# Altium PCB PCB.PcbDoc
Units mm, origin at the board's own origin, x right, y up, seen from the top; angles counter-clockwise.
Board outline 78 x 122 mm, 2 copper layers (Top Layer, Bottom Layer); 67 components, 96 nets, 356 pads, 13 vias.
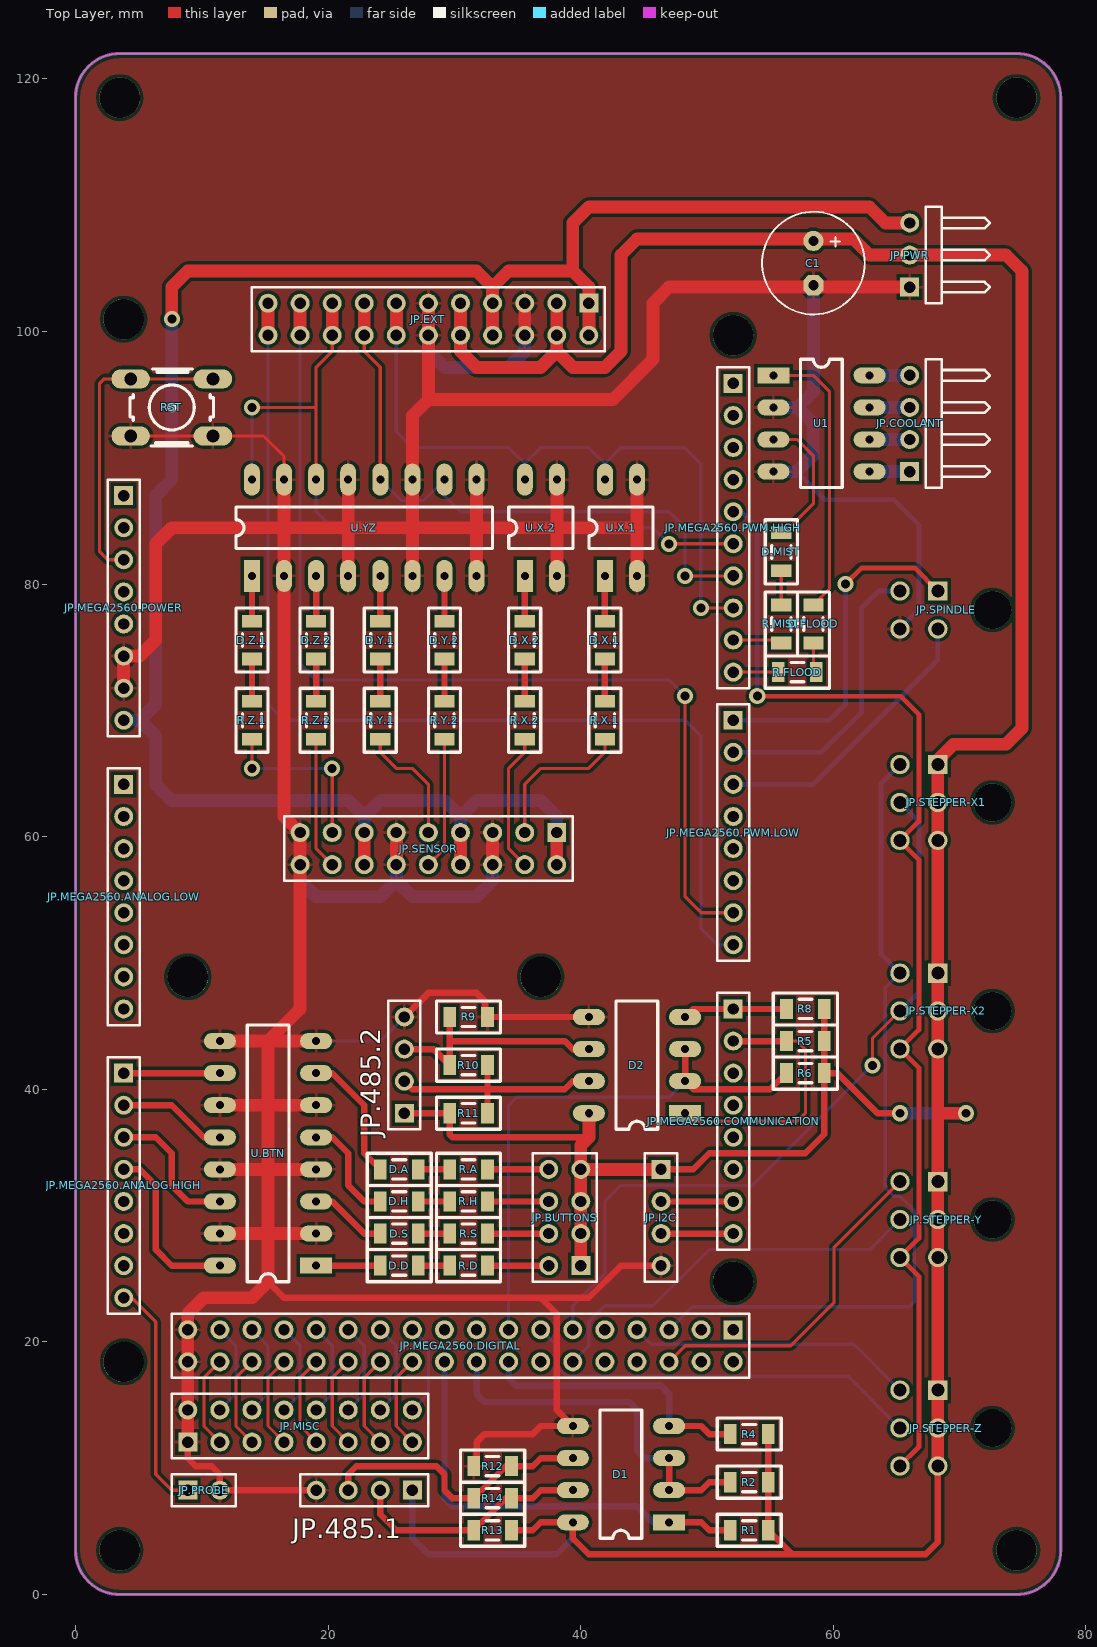
[diagram p0: Top Layer view]
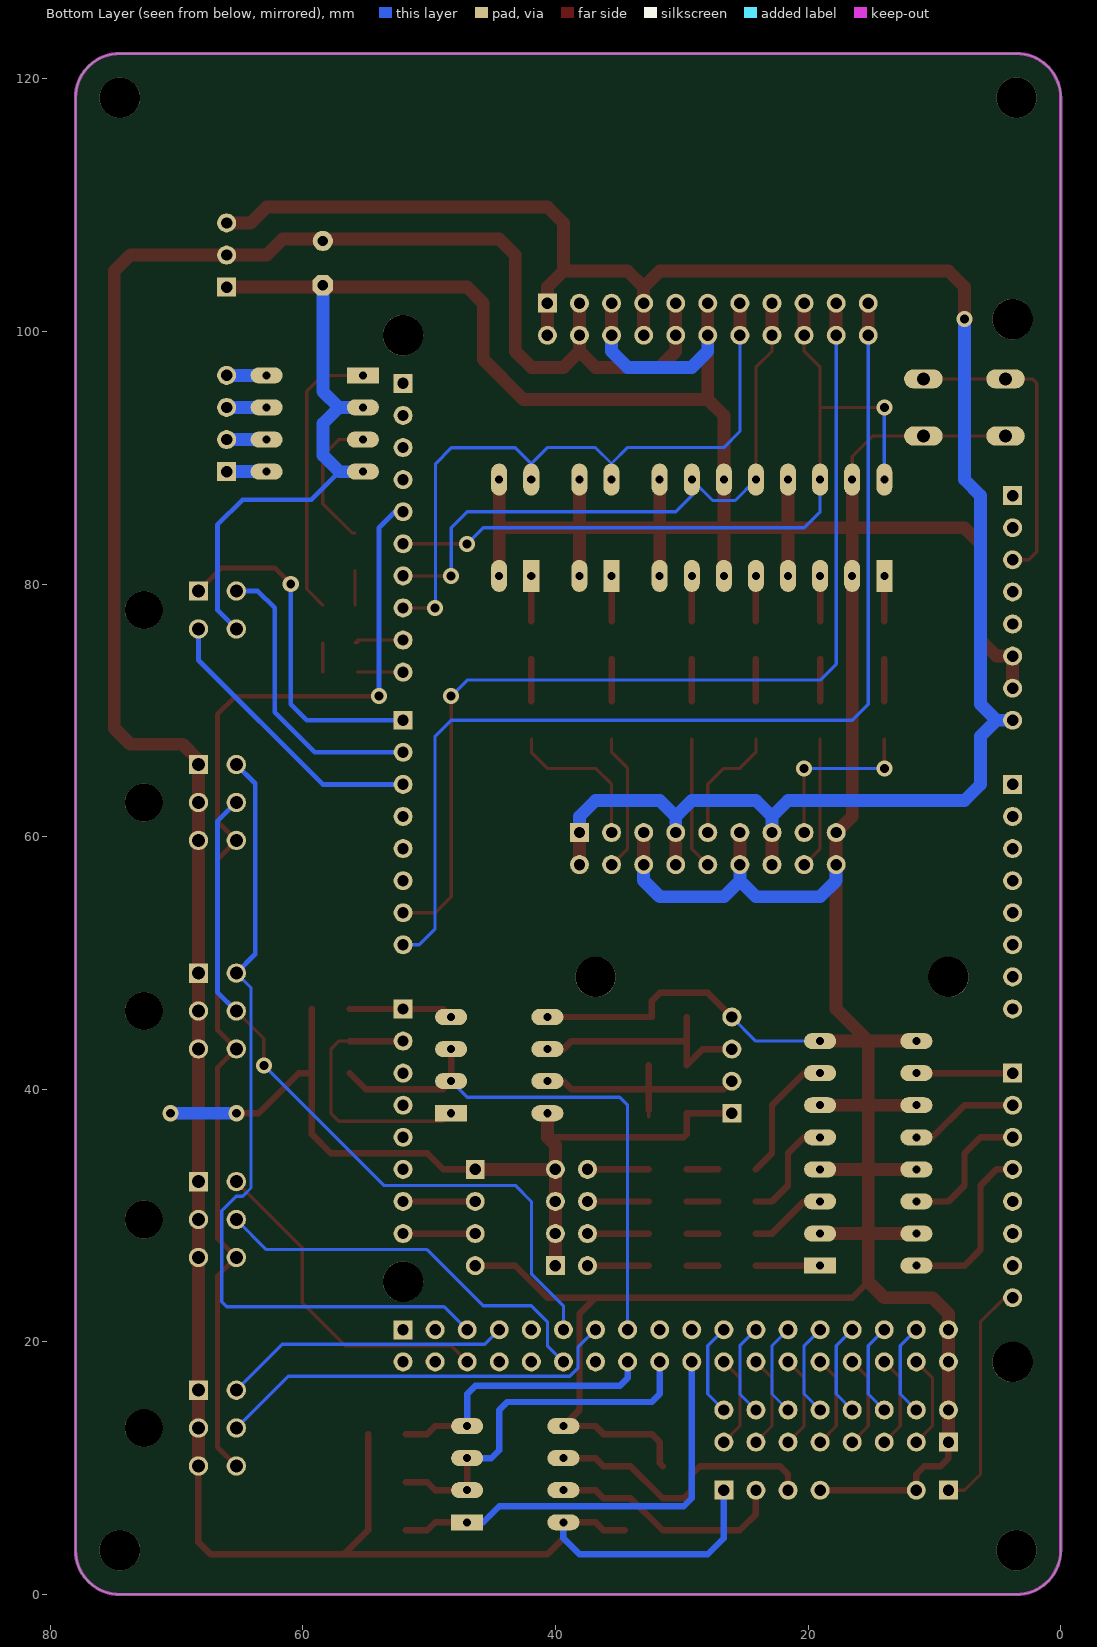
[diagram p1: Bottom Layer view, seen from below]
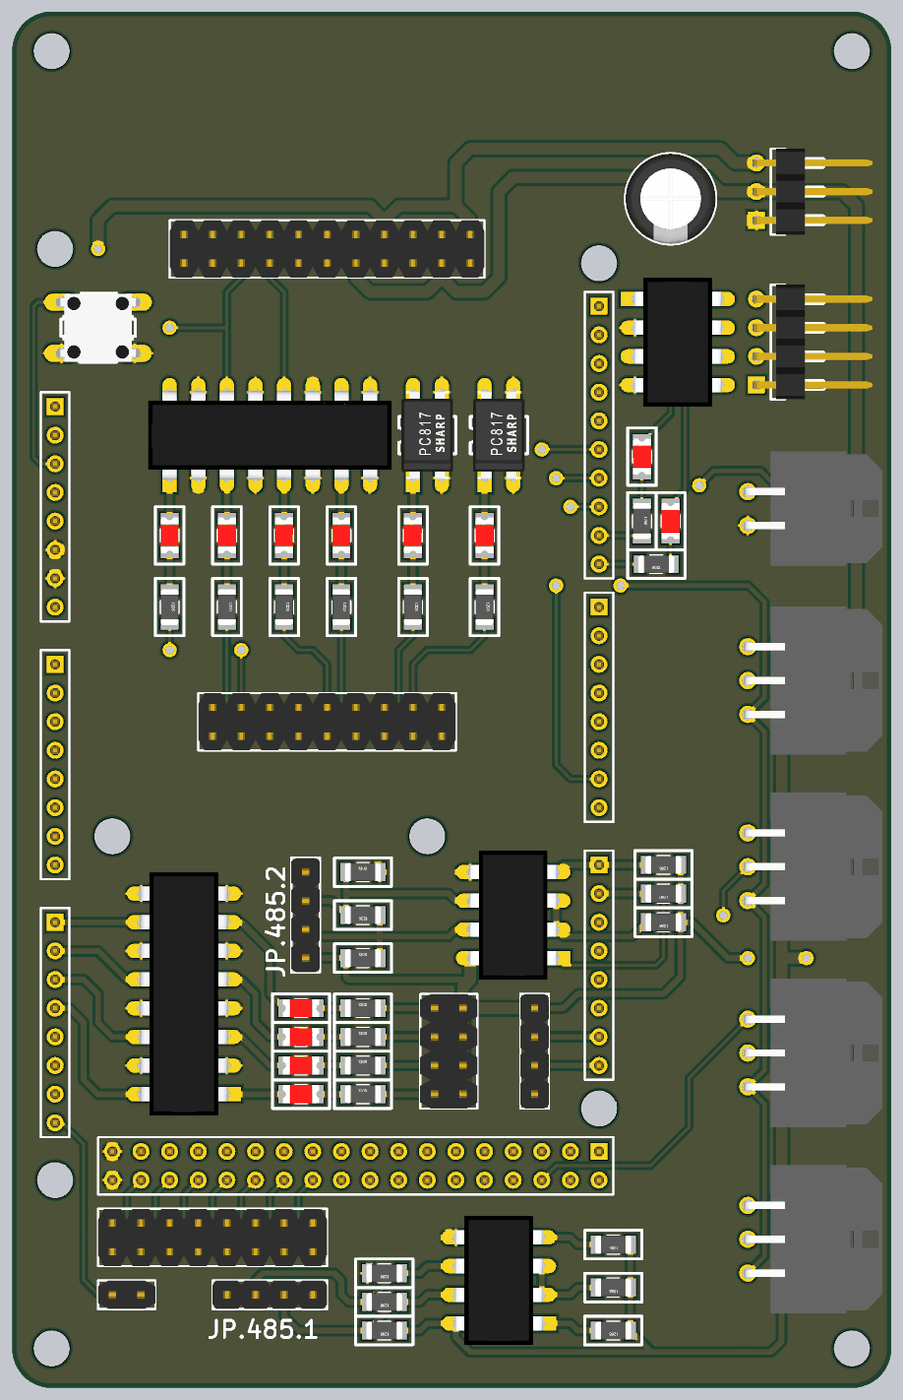
[diagram p2: 3D render of the assembled board from above, using the file's embedded part models]

## Layer stack, top to bottom
Top Solder: solder mask 0.0102, Solder Resist, Dk 3.5
Top Layer: signal copper 0.0356
Dielectric 1: dielectric 0.32, FR-4, Dk 4.8
Bottom Layer: signal copper 0.0356
Bottom Solder: solder mask 0.0102, Solder Resist, Dk 3.5

## Board outline
3.5,0 cw(c3.5,3.5) 0,3.5 0,118.5 cw(c3.5,118.5) 3.5,122 74.5,122 cw(c74.5,118.5) 78,118.5 78,3.5 cw(c74.5,3.5) 74.5,0

## Design rules (kind name [scope] priority, off if disabled: settings)
Clearance [All] p1: gap=0.254
HoleSize [All] p1: absolutevalues=TRUE maxlimit=6.3 minlimit=0.2 maxpercent=80.000 minpercent=20.000
PolygonConnect [All] p1: connectstyle=Relief reliefconductorwidth=0.254 reliefentries=4 polygonreliefangle="90 Angle" airgapwidth=0.254
RoutingVias [All] p1: holewidth=0.711 width=1.27 viastyle="Through Hole" minholewidth=0.711 minwidth=1.27 maxholewidth=0.711 maxwidth=1.27
SMDNeckDown [All] p1: percent=75.000
SilkToSilkClearance [All] p1: silktosilkclearance=0.152
SolderMaskExpansion [All] p1: expansion=0.102
Width [All] p1: maxlimit=2.54 minlimit=0.254 preferedwidth=0.254
28 further rules are at their usual default settings.

## Components (designator, comment, footprint, x,y, rotation, side; value= is the part's Value field where it differs from the comment)
C1 "*" E3,5-8 58.42,105.41 r270 top
D1 "MAX485" DIP8 43.18,9.525 r180 top
D2 "MAX485" DIP8 44.45,41.91 r180 top
D.A "LED" 1206-SMD-LED 25.63,33.655 r180 top
D.D "LED" 1206-SMD-LED 25.63,26.035 r180 top
D.FLOOD "LED" 1206-SMD-LED 58.42,76.835 r90 top
D.H "LED" 1206-SMD-LED 25.63,31.115 r180 top
D.MIST "LED" 1206-SMD-LED 55.88,82.55 r90 top
D.S "LED" 1206-SMD-LED 25.63,28.575 r180 top
D.X.1 "LED" 1206-SMD-LED 41.91,75.565 r90 top
D.X.2 "LED" 1206-SMD-LED 35.56,75.565 r90 top
D.Y.1 "LED" 1206-SMD-LED 24.13,75.565 r90 top
D.Y.2 "LED" 1206-SMD-LED 29.21,75.565 r90 top
D.Z.1 "LED" 1206-SMD-LED 13.97,75.565 r90 top
D.Z.2 "LED" 1206-SMD-LED 19.05,75.565 r90 top
JP.485.1 "HDR4" HDR1X4 22.86,8.255 r180 top
JP.485.2 "HDR4" HDR1X4 26.035,41.91 r90 top
JP.BUTTONS "HDR2X4" HDR2X4 38.735,29.845 r90 top
JP.COOLANT "HDR4" HDR1X4H 66.04,92.71 r90 top
JP.EXT "HDR2X11" HDR2X11 27.94,100.965 r180 top
JP.I2C "HDR4" HDR1X4 46.355,29.845 r270 top
JP.MEGA2560.ANALOG.HIGH "HDR8" HDR8-BOTTOM 3.81,32.385 r270 top
JP.MEGA2560.ANALOG.LOW "HDR8" HDR8-BOTTOM 3.81,55.245 r270 top
JP.MEGA2560.COMMUNICATION "HDR8" HDR8-BOTTOM 52.07,37.465 r270 top
JP.MEGA2560.DIGITAL "HDR2X18" HDR2X18-BOTTOM 30.48,19.685 r180 top
JP.MEGA2560.POWER "HDR8" HDR8-BOTTOM 3.81,78.105 r270 top
JP.MEGA2560.PWM.HIGH "HDR10" HDR10-BOTTOM 52.07,84.455 r270 top
JP.MEGA2560.PWM.LOW "HDR8" HDR8-BOTTOM 52.07,60.325 r270 top
JP.MISC "HDR2X8" HDR2X8 17.78,13.335 r0 top
JP.PROBE "HDR2" HDR1X2 10.16,8.255 r0 top
JP.PWR "HDR3" HDR1X3H 66.04,106.045 r90 top
JP.SENSOR "HDR2X9" HDR2X9 27.94,59.055 r180 top
JP.SPINDLE "43045-0400" 43045-0400 72.59,77.945 r90 top
JP.STEPPER-X1 "43045-0600" 43045-0600 72.59,62.705 r90 top
JP.STEPPER-X2 "43045-0600" 43045-0600 72.59,46.195 r90 top
JP.STEPPER-Y "43045-0600" 43045-0600 72.59,29.685 r90 top
JP.STEPPER-Z "43045-0600" 43045-0600 72.59,13.175 r90 top
R1 "*" 1206-SMD-RES 53.34,5.08 r0 top
R2 "*" 1206-SMD-RES 53.34,8.89 r0 top
R4 "*" 1206-SMD-RES 53.34,12.7 r0 top
R5 "*" 1206-SMD-RES 57.785,43.815 r0 top
R6 "*" 1206-SMD-RES 57.785,41.275 r0 top
R8 "*" 1206-SMD-RES 57.785,46.355 r0 top
R9 "*" 1206-SMD-RES 31.115,45.72 r180 top
R10 "*" 1206-SMD-RES 31.115,41.91 r0 top
R11 "*" 1206-SMD-RES 31.115,38.1 r180 top
R12 "*" 1206-SMD-RES 33.02,10.16 r0 top
R13 "*" 1206-SMD-RES 33.02,5.08 r0 top
R14 "*" 1206-SMD-RES 33.02,7.62 r0 top
R.A "*" 1206-SMD-RES 31.115,33.655 r180 top
R.D "*" 1206-SMD-RES 31.115,26.035 r180 top
R.FLOOD "*" 1206-SMD-RES 57.15,73.025 r0 top
R.H "*" 1206-SMD-RES 31.115,31.115 r180 top
R.MIST "*" 1206-SMD-RES 55.88,76.835 r90 top
R.S "*" 1206-SMD-RES 31.115,28.575 r180 top
R.X.1 "*" 1206-SMD-RES 41.91,69.215 r90 top
R.X.2 "*" 1206-SMD-RES 35.56,69.215 r90 top
R.Y.1 "*" 1206-SMD-RES 24.13,69.215 r90 top
R.Y.2 "*" 1206-SMD-RES 29.21,69.215 r90 top
R.Z.1 "*" 1206-SMD-RES 13.97,69.215 r90 top
R.Z.2 "*" 1206-SMD-RES 19.05,69.215 r90 top
RST "OMRON SWITCH" B3F-10XX 7.62,93.98 r180 top
U1 "LTV827" DIP8 59.055,92.71 r0 top
U.BTN "LTV847" DIP16 15.24,34.925 r180 top
U.X.1 "PC817" DIP4 43.18,84.455 r90 top
U.X.2 "PC817" DIP4 36.83,84.455 r90 top
U.YZ "LTV847" DIP16 22.86,84.455 r90 top

## Footprints (in the part's own frame and the unit in brackets; to place one, negate y for a bottom-side part, rotate by r counter-clockwise, add the part's x,y. Pads: shape width x height; smd on the part's side, far side on the other; paste and mask are expansions set on the pad)
1206-SMD-LED [mm]
  rect 1x1.6 smd: 1(-1.5,0) 2(1.5,0)
  silkscreen extent -2.54,-1.27 2.54,1.27, body extent -1.6,-0.8 1.6,0.8, height 1.11
1206-SMD-RES [mm]
  rect 1x1.6 smd: 1(-1.5,0) 2(1.5,0)
  silkscreen extent -2.54,-1.27 2.54,1.27, body extent -1.6,-0.8 1.6,0.8, height 1.01
43045-0400 [mm]
  round 3 hole 3 unplated: 0(0,0)
  rect 1.53x1.53 hole 1.02: 1(1.5,4.32)
  round 1.53 hole 1.02: 2(-1.5,4.32) 3(1.5,7.32) 4(-1.5,7.32)
  body extent -5.07,-4.6 5.07,7.64, height 8.78
43045-0600 [mm]
  round 3 hole 3 unplated: 0(0,0)
  rect 1.53x1.53 hole 1.02: 1(3,4.32)
  round 1.53 hole 1.02: 2(0,4.32) 3(-3,4.32) 4(3,7.32) 5(0,7.32) 6(-3,7.32)
  body extent -6.57,-4.6 6.57,7.64, height 8.78
B3F-10XX [mil]
  oval 120x60 hole 40: 1(-128,89) 2(128,89) 3(-128,-89) 4(128,-89)
  silkscreen extent -130,-120 130,120, body extent -152,-118 152,118, height 170
DIP4 [mm]
  rect 2.54x1.27 hole 0.635: 1(-3.81,1.261)
  oval 2.54x1.27 hole 0.635: 2(-3.81,-1.279) 3(3.81,-1.279) 4(3.81,1.261)
  silkscreen extent -1.65,-2.55 1.65,2.53, body extent -3.94,-2.3 3.94,2.3, height 4.3
DIP8 [mm]
  rect 2.54x1.27 hole 0.635: 1(-3.81,3.81)
  oval 2.54x1.27 hole 0.635: 2(-3.81,1.27) 3(-3.81,-1.27) 4(-3.81,-3.81) 5(3.81,-3.81) 6(3.81,-1.27) 7(3.81,1.27) 8(3.81,3.81)
  silkscreen extent -1.65,-5.08 1.65,5.08, body extent -3.94,-5.71 3.94,5.72, height 4.19
DIP16 [mm]
  rect 2.54x1.27 hole 0.635: 1(-3.81,8.89)
  oval 2.54x1.27 hole 0.635: 2(-3.81,6.35) 3(-3.81,3.81) 4(-3.81,1.27) 5(-3.81,-1.27) 6(-3.81,-3.81) 7(-3.81,-6.35) 8(-3.81,-8.89) 9(3.81,-8.89) 10(3.81,-6.35) 11(3.81,-3.81) 12(3.81,-1.27) 13(3.81,1.27) 14(3.81,3.81) 15(3.81,6.35) 16(3.81,8.89)
  silkscreen extent -1.65,-10.16 1.65,10.16, body extent -3.94,-10.79 3.94,10.79, height 4.19
E3,5-8 [mil]
  round 63 hole 32: +(-68.9,0)
  oct 63x63 hole 32: -(68.9,0)
  silkscreen extent -160,-160 160,160, body extent -158,-157 158,157, height 484
HDR1X2 [mm] "Connector; Header; 2 Position"
  rect 1.5x1.5 hole 0.9: 1(-1.27,0)
  round 1.5 hole 0.9: 2(1.27,0)
  silkscreen extent -2.54,-1.27 2.54,1.27, body extent -2.54,-1.27 2.54,1.27, height 8.61
HDR1X3H [mm] "Connector; Header; 3 Position; Right Angle"
  rect 1.5x1.5 hole 0.9: 1(-2.54,0)
  round 1.5 hole 0.9: 2(0,0) 3(2.54,0)
  silkscreen extent -3.81,-6.35 3.81,-1.27, body extent -3.81,-10.3 3.81,0.32, height 2.55
HDR1X4 [mm] "Connector; Header; 4 Position"
  rect 1.5x1.5 hole 0.9: 1(-3.81,0)
  round 1.5 hole 0.9: 2(-1.27,0) 3(1.27,0) 4(3.81,0)
  silkscreen extent -5.08,-1.27 5.08,1.27, body extent -5.08,-1.27 5.08,1.27, height 9.11
HDR1X4H [mm] "Connector; Header; 4 Position; Right Angle"
  rect 1.5x1.5 hole 0.9: 1(-3.81,0)
  round 1.5 hole 0.9: 2(-1.27,0) 3(1.27,0) 4(3.81,0)
  silkscreen extent -5.08,-6.35 5.08,-1.27, body extent -5.08,-10.3 5.08,0.32, height 2.55
HDR2X4 [mm] "Connector; Header; 4x2 Position"
  rect 1.5x1.5 hole 0.9: 1(-3.81,-1.27)
  round 1.5 hole 0.9: 2(-3.81,1.27) 3(-1.27,-1.27) 4(-1.27,1.27) 5(1.27,-1.27) 6(1.27,1.27) 7(3.81,-1.27) 8(3.81,1.27)
  silkscreen extent -5.08,-2.54 5.08,2.54, body extent -5.08,-2.54 5.08,2.54, height 8.61
HDR2X8 [mm] "Connector; Header; 8x2 Position"
  rect 1.5x1.5 hole 0.9: 1(-8.89,-1.27)
  round 1.5 hole 0.9: 2(-8.89,1.27) 3(-6.35,-1.27) 4(-6.35,1.27) 5(-3.81,-1.27) 6(-3.81,1.27) 7(-1.27,-1.27) 8(-1.27,1.27) 9(1.27,-1.27) 10(1.27,1.27) 11(3.81,-1.27) 12(3.81,1.27) 13(6.35,-1.27) 14(6.35,1.27) 15(8.89,-1.27) 16(8.89,1.27)
  silkscreen extent -10.16,-2.54 10.16,2.54, body extent -10.16,-2.54 10.16,2.54, height 8.61
HDR2X9 [mm] "Connector; Header; 9x2 Position"
  rect 1.5x1.5 hole 0.9: 1(-10.16,-1.27)
  round 1.5 hole 0.9: 2(-10.16,1.27) 3(-7.62,-1.27) 4(-7.62,1.27) 5(-5.08,-1.27) 6(-5.08,1.27) 7(-2.54,-1.27) 8(-2.54,1.27) 9(0,-1.27) 10(0,1.27) 11(2.54,-1.27) 12(2.54,1.27) 13(5.08,-1.27) 14(5.08,1.27) 15(7.62,-1.27) 16(7.62,1.27) 17(10.16,-1.27) 18(10.16,1.27)
  silkscreen extent -11.43,-2.54 11.43,2.54, body extent -11.43,-2.54 11.43,2.54, height 8.61
HDR2X11 [mm] "Connector; Header; 11x2 Position"
  rect 1.5x1.5 hole 0.9: 1(-12.7,-1.27)
  round 1.5 hole 0.9: 2(-12.7,1.27) 3(-10.16,-1.27) 4(-10.16,1.27) 5(-7.62,-1.27) 6(-7.62,1.27) 7(-5.08,-1.27) 8(-5.08,1.27) 9(-2.54,-1.27) 10(-2.54,1.27) 11(0,-1.27) 12(0,1.27) 13(2.54,-1.27) 14(2.54,1.27) 15(5.08,-1.27) 16(5.08,1.27) 17(7.62,-1.27) 18(7.62,1.27) 19(10.16,-1.27) 20(10.16,1.27) 21(12.7,-1.27) 22(12.7,1.27)
  silkscreen extent -13.97,-2.54 13.97,2.54, body extent -13.97,-2.54 13.97,2.54, height 8.61
HDR2X18-BOTTOM [mm]
  rect 1.5x1.5 hole 0.9: 1(-21.59,-1.27)
  round 1.5 hole 0.9: 2(-21.59,1.27) 3(-19.05,-1.27) 4(-19.05,1.27) 5(-16.51,-1.27) 6(-16.51,1.27) 7(-13.97,-1.27) 8(-13.97,1.27) 9(-11.43,-1.27) 10(-11.43,1.27) 11(-8.89,-1.27) 12(-8.89,1.27) 13(-6.35,-1.27) 14(-6.35,1.27) 15(-3.81,-1.27) 16(-3.81,1.27) 17(-1.27,-1.27) 18(-1.27,1.27) 19(1.27,-1.27) 20(1.27,1.27) 21(3.81,-1.27) 22(3.81,1.27) 23(6.35,-1.27) 24(6.35,1.27) 25(8.89,-1.27) 26(8.89,1.27) 27(11.43,-1.27) 28(11.43,1.27) 29(13.97,-1.27) 30(13.97,1.27) 31(16.51,-1.27) 32(16.51,1.27) 33(19.05,-1.27) 34(19.05,1.27) 35(21.59,-1.27) 36(21.59,1.27)
  silkscreen extent -22.86,-2.54 22.86,2.54, body extent -22.86,-2.54 22.86,2.54, height 8.61
HDR8-BOTTOM [mm]
  rect 1.5x1.5 hole 0.9: 1(-8.89,0)
  round 1.5 hole 0.9: 2(-6.35,0) 3(-3.81,0) 4(-1.27,0) 5(1.27,0) 6(3.81,0) 7(6.35,0) 8(8.89,0)
  silkscreen extent -10.16,-1.27 10.16,1.27, body extent -10.16,-1.27 10.16,1.27, height 9.11
HDR10-BOTTOM [mm]
  rect 1.5x1.5 hole 0.9: 1(-11.43,0)
  round 1.5 hole 0.9: 2(-8.89,0) 3(-6.35,0) 4(-3.81,0) 5(-1.27,0) 6(1.27,0) 7(3.81,0) 8(6.35,0) 9(8.89,0) 10(11.43,0)
  silkscreen extent -12.7,-1.27 12.7,1.27, body extent -12.7,-1.27 12.7,1.27, height 9.11

## Part data
C1: library part CAP.POL, "Polarized Capacitor (Radial)"
R1 R2 R4 R5 R6 R8 R9 R10 R11 R12 R13 R14 R.A R.D R.FLOOD R.H R.MIST R.S R.X.1 R.X.2 R.Y.1 R.Y.2 R.Z.1 R.Z.2: library part RES
RST: library part B3F-10-XX

## Free pads (board coordinates)
  round 3.2 hole 3.2 unplated: 0(3.5,3.5) 0(3.5,118.5) 0(3.81,18.415) 0(3.81,100.965) 0(8.89,48.895) 0(36.83,48.895) 0(52.07,24.765) 0(52.07,99.695) 0(74.5,3.5) 0(74.5,118.5)

## Via types
v1: diameter 1.27, hole 0.711, Top Layer to Bottom Layer, 13 vias

## Nets (pads, with @x,y where several pads share a name; then routed paths per layer and width w, separated by ;. In a path a pad name is that pad's centre, name@x,y a point inside that pad or via, vN(x,y) a via of type N, cw(c..) or ccw(c..) an arc to the next point about the centre after c; other vN are vias at no path point)
+5V: C1.+ D1.8 D2.8 JP.485.1.1 JP.485.2.1 JP.BUTTONS.1 JP.BUTTONS.3 JP.BUTTONS.5 JP.BUTTONS.7 JP.EXT.3 JP.EXT.4 JP.EXT.9 JP.EXT.10 JP.I2C.1 JP.PWR.2 JP.STEPPER-X1.1 JP.STEPPER-X1.2 JP.STEPPER-X1.3 JP.STEPPER-X2.1 JP.STEPPER-X2.2 JP.STEPPER-X2.3 JP.STEPPER-Y.1 JP.STEPPER-Y.2 JP.STEPPER-Y.3 JP.STEPPER-Z.1 JP.STEPPER-Z.2 JP.STEPPER-Z.3 R1.2 R2.2 R4.2 R5.2 R6.2 R8.2 R11.2 R13.2 | length 308.5
  Top Layer w0.508: JP.485.2.1 R11.2 29.615,36.425 29.845,36.195 40.64,36.195 ; R13.2 36.195,5.08 36.83,5.715 D1.8 39.37,4.445 40.64,3.175 56.745,3.175 ; JP.I2C.1 48.895,33.655 50.165,34.925 57.785,34.925 59.285,36.425 R6.2 ; R4.2 R2.2 R1.2 56.745,3.175 ; R8.2 R5.2 R6.2 ; v1(65.27,38.1) 63.5,38.1 60.325,41.275 R6.2 ; JP.STEPPER-Z.3 68.27,4.135 67.31,3.175 56.745,3.175
  Top Layer w1.016: JP.EXT.9 JP.EXT.10 30.48,98.425 31.75,97.155 36.83,97.155 38.1,98.425 ; JP.EXT.3 JP.EXT.4 38.1,98.425 ; JP.BUTTONS.1 JP.BUTTONS.3 JP.BUTTONS.5 JP.BUTTONS.7 ; D2.8 40.64,36.195 40.005,35.56 JP.BUTTONS.7 ; JP.I2C.1 JP.BUTTONS.7 ; JP.STEPPER-Z.3 JP.STEPPER-Z.2 JP.STEPPER-Z.1 JP.STEPPER-Y.3 JP.STEPPER-Y.2 JP.STEPPER-Y.1 JP.STEPPER-X2.3 JP.STEPPER-X2.2 JP.STEPPER-X2.1 JP.STEPPER-X1.3 JP.STEPPER-X1.2 JP.STEPPER-X1.1 68.27,66.065 69.515,67.31 73.66,67.31 74.93,68.58 74.93,104.775 73.66,106.045 JP.PWR.2 62.865,106.045 61.595,107.315 58.575,107.315 C1.+ 58.265,107.315 44.45,107.315 43.18,106.045 43.18,98.425 41.91,97.155 39.37,97.155 38.1,98.425 ; 68.27,38.1 v1(70.485,38.1)
  Bottom Layer w0.508: JP.485.1.1 26.67,4.445 27.94,3.175 38.1,3.175 39.37,4.445 D1.8
  Bottom Layer w1.016: v1(65.27,38.1) v1(70.485,38.1)
A1: D1.6 JP.485.1.3 R12.2 R14.1 | length 22.4
  Top Layer w0.508: JP.485.1.3 21.59,9.525 22.225,10.16 28.575,10.16 29.21,9.525 29.21,8.255 29.845,7.62 R14.1 34.06,10.16 R12.2 36.195,10.16 36.83,10.795 D1.6
A2: D2.6 JP.485.2.3 R9.2 R10.1 | length 19.2
  Top Layer w0.508: JP.485.2.3 28.345,43.18 R10.1 29.615,43.815 ; R9.2 29.615,43.815 ; D2.6 39.37,43.18 38.735,43.815 29.615,43.815
B1: D1.7 JP.485.1.2 R13.1 R14.2 | length 19
  Top Layer w0.508: JP.485.1.2 24.13,6.35 25.4,5.08 R13.1 34.06,7.62 R14.2 36.195,7.62 36.83,8.255 D1.7
B2: D2.7 JP.485.2.2 R10.2 R11.1 | length 19.2
  Top Layer w0.254: R11.1@32.615,37.8 R11.1 R11.1@32.615,38.33
  Top Layer w0.508: JP.485.2.2 26.67,40.005 32.615,40.005 ; R11.1@32.615,38.33 32.615,40.005 ; R10.2 32.615,40.005 ; D2.7 39.37,40.64 38.735,40.005 32.615,40.005
MEGA2560.A8.RESET.ABORT: JP.MEGA2560.ANALOG.HIGH.1 U.BTN.10 | length 7.6
  Top Layer w0.508: JP.MEGA2560.ANALOG.HIGH.1 U.BTN.10
MEGA2560.A9.FEED.HOLD: JP.MEGA2560.ANALOG.HIGH.2 U.BTN.12 | length 8.7
  Top Layer w0.508: JP.MEGA2560.ANALOG.HIGH.2 7.62,38.735 10.16,36.195 U.BTN.12
MEGA2560.A10.CYCLE.START: JP.MEGA2560.ANALOG.HIGH.3 U.BTN.14 | length 11.2
  Top Layer w0.508: JP.MEGA2560.ANALOG.HIGH.3 6.35,36.195 7.62,34.925 7.62,32.385 8.89,31.115 U.BTN.14
MEGA2560.A11.SAFETY.DOOR: JP.MEGA2560.ANALOG.HIGH.4 U.BTN.16 | length 13.8
  Top Layer w0.508: JP.MEGA2560.ANALOG.HIGH.4 5.08,33.655 6.35,32.385 6.35,27.305 7.62,26.035 U.BTN.16
MEGA2560.A15.PROBE: JP.MEGA2560.ANALOG.HIGH.8 JP.PROBE.1 | length 18.5
  Top Layer w0.254: JP.MEGA2560.ANALOG.HIGH.8 4.445,23.495 6.35,21.59 6.35,9.525 7.62,8.255 JP.PROBE.1
MEGA2560.D0.RXD0: JP.EXT.21 JP.EXT.22 JP.MEGA2560.PWM.LOW.8 | length 85.4
  Top Layer w1.016: JP.EXT.22 JP.EXT.21
  Bottom Layer w0.254: JP.EXT.22 15.24,70.485 16.51,69.215 48.26,69.215 49.53,67.945 49.53,52.705 50.8,51.435 JP.MEGA2560.PWM.LOW.8
MEGA2560.D1.TXD0: JP.EXT.19 JP.EXT.20 JP.MEGA2560.PWM.LOW.7 | length 80.3
  Top Layer w0.254: v1(48.26,71.12) 48.26,55.245 49.53,53.975 JP.MEGA2560.PWM.LOW.7
  Top Layer w1.016: JP.EXT.20 JP.EXT.19
  Bottom Layer w0.254: JP.EXT.20 17.78,73.66 19.05,72.39 46.99,72.39 v1(48.26,71.12)
MEGA2560.D5.SPINDLE.DIR: JP.MEGA2560.PWM.LOW.3 JP.SPINDLE.2 | length 22.7
  Bottom Layer w0.381: JP.MEGA2560.PWM.LOW.3 58.42,64.135 68.27,73.985 JP.SPINDLE.2
MEGA2560.D6.SPINDLE.EN: JP.MEGA2560.PWM.LOW.2 JP.SPINDLE.3 | length 23.3
  Bottom Layer w0.381: JP.MEGA2560.PWM.LOW.2 59.055,66.675 62.23,69.85 62.23,78.105 63.57,79.445 JP.SPINDLE.3
MEGA2560.D7.SPINDLE.PWM: JP.MEGA2560.PWM.LOW.1 JP.SPINDLE.1 | length 27.5
  Top Layer w0.381: v1(60.96,80.01) 62.23,81.28 66.435,81.28 JP.SPINDLE.1
  Bottom Layer w0.381: JP.MEGA2560.PWM.LOW.1 59.69,69.215 60.96,70.485 v1(60.96,80.01)
MEGA2560.D8.COOLANT.FLOOD: JP.MEGA2560.PWM.HIGH.10 R.FLOOD.1 | length 3.6
  Top Layer w0.254: JP.MEGA2560.PWM.HIGH.10 R.FLOOD.1
MEGA2560.D9.COOLANT.MIST: JP.MEGA2560.PWM.HIGH.9 R.MIST.1 | length 4
  Top Layer w0.254: JP.MEGA2560.PWM.HIGH.9 55.65,75.565 55.65,75.387 55.828,75.387 R.MIST.1
MEGA2560.D10.LIMIT.X: JP.EXT.13 JP.EXT.14 JP.MEGA2560.PWM.HIGH.8 U.X.1.4 U.X.2.4 | length 53.9
  Top Layer w0.254: v1(49.53,78.105) JP.MEGA2560.PWM.HIGH.8
  Top Layer w1.016: JP.EXT.14 JP.EXT.13
  Bottom Layer w0.254: JP.EXT.14 25.4,92.075 26.67,90.805 34.308,90.805 35.569,89.544 ; U.X.2.4 35.569,89.544 ; U.X.1.4 U.X.1.4@41.919,89.526 ; v1@49.494,78.141 49.494,89.535 48.242,90.787 43.18,90.787 U.X.1.4@41.919,89.526 ; 35.569,89.544 36.83,90.805 40.64,90.805 U.X.1.4@41.919,89.526
MEGA2560.D11.LIMIT.Y: JP.EXT.15 JP.EXT.16 JP.MEGA2560.PWM.HIGH.7 U.YZ.10 U.YZ.12 | length 49.9
  Top Layer w0.254: JP.EXT.16 22.86,98.425 24.13,97.155 U.YZ.12 ; v1(48.26,80.645) JP.MEGA2560.PWM.HIGH.7
  Top Layer w1.016: JP.EXT.16 JP.EXT.15
  Bottom Layer w0.254: U.YZ.12 25.781,86.614 27.559,86.614 U.YZ.10 29.21,86.995 30.48,85.725 46.99,85.725 48.26,84.455 v1(48.26,80.645)
MEGA2560.D12.LIMIT.Z: JP.EXT.17 JP.EXT.18 JP.MEGA2560.PWM.HIGH.6 U.YZ.14 U.YZ.16 | length 61.9
  Top Layer w0.254: v1(13.97,93.98) 19.05,93.98 ; U.YZ.14 19.05,97.155 20.32,98.425 JP.EXT.18 ; v1(46.99,83.185) JP.MEGA2560.PWM.HIGH.6
  Top Layer w1.016: JP.EXT.18 JP.EXT.17
  Bottom Layer w0.254: U.YZ.16 v1(13.97,93.98) ; U.YZ.14 19.05,85.725 20.32,84.455 45.72,84.455 v1(46.99,83.185)
MEGA2560.D13.STEPPER.EN: JP.MEGA2560.PWM.HIGH.5 JP.STEPPER-X1.6 JP.STEPPER-X2.6 JP.STEPPER-Y.6 JP.STEPPER-Z.6 | length 93.6
  Top Layer w0.254: JP.MEGA2560.PWM.HIGH.5 JP.MEGA2560.PWM.HIGH.5@52.705,85.725
  Top Layer w0.381: v1(53.975,71.12) 65.325,71.12 66.77,69.675 66.77,61.205 JP.STEPPER-X1.6 65.27,59.675 66.77,58.175 66.77,44.695 JP.STEPPER-X2.6 66.77,41.695 66.77,28.185 JP.STEPPER-Y.6 66.77,25.185 66.77,11.675 JP.STEPPER-Z.6
  Bottom Layer w0.381: JP.MEGA2560.PWM.HIGH.5 52.705,85.725 53.975,84.455 v1(53.975,71.12)
MEGA2560.D14.TXD3: D2.4 JP.MEGA2560.COMMUNICATION.1 R8.1 | length 8.3
  Top Layer w0.508: D2.4 48.895,46.355 JP.MEGA2560.COMMUNICATION.1 R8.1
MEGA2560.D15.RXD3: D2.1 JP.MEGA2560.COMMUNICATION.2 R5.1 | length 21.1
  Top Layer w0.254: D2.1 48.895,37.465 57.15,37.465 57.785,38.1 57.785,43.18 57.15,43.815 R5.1
  Top Layer w0.508: JP.MEGA2560.COMMUNICATION.2 R5.1
MEGA2560.D16.TXD2: JP.MEGA2560.COMMUNICATION.3
MEGA2560.D17.RXD2: JP.MEGA2560.COMMUNICATION.4
MEGA2560.D18.TXD1: JP.MEGA2560.COMMUNICATION.5
MEGA2560.D19.RXD1: JP.MEGA2560.COMMUNICATION.6
MEGA2560.D20.SDA: JP.I2C.2 JP.MEGA2560.COMMUNICATION.7 | length 5.7
  Top Layer w0.508: JP.I2C.2 JP.MEGA2560.COMMUNICATION.7
MEGA2560.D21.SCL: JP.I2C.3 JP.MEGA2560.COMMUNICATION.8 | length 5.7
  Top Layer w0.508: JP.I2C.3 JP.MEGA2560.COMMUNICATION.8
MEGA2560.D24.STEP.X: JP.MEGA2560.DIGITAL.5 JP.STEPPER-X1.4 JP.STEPPER-X2.4 | length 65.9
  Bottom Layer w0.254: JP.MEGA2560.DIGITAL.5 48.819,22.784 66.04,22.784 66.421,23.165 66.421,30.378 65.278,31.521 64.77,31.521 64.11,32.182 64.11,48.035 JP.STEPPER-X2.4
  Bottom Layer w0.381: JP.STEPPER-X2.4 63.79,50.675 63.77,50.675 63.77,64.205 JP.STEPPER-X1.4
MEGA2560.D25.STEP.Y: JP.MEGA2560.DIGITAL.6 JP.STEPPER-Y.4 | length 26.8
  Top Layer w0.254: JP.MEGA2560.DIGITAL.6 48.26,19.685 56.642,19.685 60.046,23.089 60.046,27.461 JP.STEPPER-Y.4
MEGA2560.D26.STEP.Z: JP.MEGA2560.DIGITAL.7 JP.STEPPER-Z.4 | length 22.8
  Bottom Layer w0.254: JP.MEGA2560.DIGITAL.7 45.593,19.812 61.633,19.812 JP.STEPPER-Z.4
MEGA2560.D30.DIR.X: JP.MEGA2560.DIGITAL.11 JP.STEPPER-X1.5 JP.STEPPER-X2.5 | length 59.8
  Top Layer w0.254: v1(63.094,41.885) 63.094,44.019 JP.STEPPER-X2.5
  Bottom Layer w0.254: JP.MEGA2560.DIGITAL.11 39.37,22.86 41.91,25.4 41.91,31.115 43.18,32.385 53.594,32.385 v1(63.094,41.885)
  Bottom Layer w0.381: JP.STEPPER-X2.5 65.29,46.195 66.77,47.675 66.77,61.205 JP.STEPPER-X1.5
MEGA2560.D31.DIR.Y: JP.MEGA2560.DIGITAL.12 JP.STEPPER-Y.5 | length 31.7
  Bottom Layer w0.254: JP.MEGA2560.DIGITAL.12 40.64,19.685 40.64,21.59 41.91,22.86 45.72,22.86 50.165,27.305 62.89,27.305 JP.STEPPER-Y.5
MEGA2560.D32.DIR.Z: JP.MEGA2560.DIGITAL.13 JP.STEPPER-Z.5 | length 32.6
  Bottom Layer w0.254: JP.MEGA2560.DIGITAL.13 38.227,19.558 38.227,17.907 38.862,17.272 61.173,17.272 JP.STEPPER-Z.5
MEGA2560.D34: D2.2 D2.3 JP.MEGA2560.DIGITAL.15 R6.1 | length 43.9
  Top Layer w0.508: D2.3 D2.2 48.895,40.005 55.015,40.005 R6.1
  Bottom Layer w0.254: JP.MEGA2560.DIGITAL.15 34.29,38.735 34.925,39.37 46.99,39.37 D2.2
MEGA2560.D35: D1.4 JP.MEGA2560.DIGITAL.16 R4.1 | length 22.1
  Top Layer w0.508: D1.4 49.53,13.335 50.165,12.7 R4.1
  Bottom Layer w0.508: JP.MEGA2560.DIGITAL.16 34.29,17.145 34.925,16.51 46.355,16.51 46.99,15.875 D1.4
MEGA2560.D36: JP.MEGA2560.DIGITAL.17
MEGA2560.D37: D1.2 D1.3 JP.MEGA2560.DIGITAL.18 R2.1 | length 29.4
  Top Layer w0.508: D1.3 D1.2 49.53,8.255 50.165,8.89 R2.1
  Bottom Layer w0.508: JP.MEGA2560.DIGITAL.18 31.75,15.875 32.385,15.24 43.815,15.24 44.45,14.605 44.45,11.43 45.085,10.795 D1.3
MEGA2560.D38: JP.MEGA2560.DIGITAL.19
MEGA2560.D39: D1.1 JP.MEGA2560.DIGITAL.20 R1.1 | length 34.5
  Top Layer w0.508: D1.1 49.53,5.715 50.165,5.08 R1.1
  Bottom Layer w0.508: JP.MEGA2560.DIGITAL.20 29.21,7.62 29.845,6.985 44.45,6.985 45.72,5.715 D1.1
MEGA2560.D40: JP.MEGA2560.DIGITAL.21 JP.MISC.16 | length 7.4
  Bottom Layer w0.254: JP.MISC.16 27.94,15.875 27.94,19.685 JP.MEGA2560.DIGITAL.21
MEGA2560.D41: JP.MEGA2560.DIGITAL.22 JP.MISC.15 | length 7.4
  Top Layer w0.254: JP.MISC.15 25.4,13.335 25.4,17.145 JP.MEGA2560.DIGITAL.22
MEGA2560.D42: JP.MEGA2560.DIGITAL.23 JP.MISC.14 | length 7.4
  Bottom Layer w0.254: JP.MISC.14 25.4,15.875 25.4,19.685 JP.MEGA2560.DIGITAL.23
MEGA2560.D43: JP.MEGA2560.DIGITAL.24 JP.MISC.13 | length 7.4
  Top Layer w0.254: JP.MISC.13 22.86,13.335 22.86,17.145 JP.MEGA2560.DIGITAL.24
MEGA2560.D44: JP.MEGA2560.DIGITAL.25 JP.MISC.12 | length 7.4
  Bottom Layer w0.254: JP.MISC.12 22.86,15.875 22.86,19.685 JP.MEGA2560.DIGITAL.25
MEGA2560.D45: JP.MEGA2560.DIGITAL.26 JP.MISC.11 | length 7.4
  Top Layer w0.254: JP.MISC.11 20.32,13.335 20.32,17.145 JP.MEGA2560.DIGITAL.26
MEGA2560.D46: JP.MEGA2560.DIGITAL.27 JP.MISC.10 | length 7.4
  Bottom Layer w0.254: JP.MISC.10 20.32,15.875 20.32,19.685 JP.MEGA2560.DIGITAL.27
MEGA2560.D47: JP.MEGA2560.DIGITAL.28 JP.MISC.9 | length 7.4
  Top Layer w0.254: JP.MISC.9 17.78,13.335 17.78,17.145 JP.MEGA2560.DIGITAL.28
MEGA2560.D48: JP.MEGA2560.DIGITAL.29 JP.MISC.8 | length 7.4
  Bottom Layer w0.254: JP.MISC.8 17.78,15.875 17.78,19.685 JP.MEGA2560.DIGITAL.29
MEGA2560.D49: JP.MEGA2560.DIGITAL.30 JP.MISC.7 | length 7.4
  Top Layer w0.254: JP.MISC.7 15.24,13.335 15.24,17.145 JP.MEGA2560.DIGITAL.30
MEGA2560.D50: JP.MEGA2560.DIGITAL.31 JP.MISC.6 | length 7.4
  Bottom Layer w0.254: JP.MISC.6 15.24,15.875 15.24,19.685 JP.MEGA2560.DIGITAL.31
MEGA2560.D51: JP.MEGA2560.DIGITAL.32 JP.MISC.5 | length 7.4
  Top Layer w0.254: JP.MISC.5 12.7,13.335 12.7,17.145 JP.MEGA2560.DIGITAL.32
MEGA2560.D52: JP.MEGA2560.DIGITAL.33 JP.MISC.4 | length 7.4
  Bottom Layer w0.254: JP.MISC.4 12.7,15.875 12.7,19.685 JP.MEGA2560.DIGITAL.33
MEGA2560.D53: JP.MEGA2560.DIGITAL.34 JP.MISC.3 | length 7.4
  Top Layer w0.254: JP.MISC.3 10.16,13.335 10.16,17.145 JP.MEGA2560.DIGITAL.34
MEGA2560.GND: C1.- D1.5 D2.5 JP.485.1.4 JP.485.2.4 JP.EXT.5 JP.EXT.6 JP.EXT.11 JP.EXT.12 JP.I2C.4 JP.MEGA2560.DIGITAL.35 JP.MEGA2560.DIGITAL.36 JP.MEGA2560.POWER.6 JP.MEGA2560.POWER.7 JP.MISC.1 JP.MISC.2 JP.PROBE.2 JP.PWR.1 JP.SENSOR.5 JP.SENSOR.6 JP.SENSOR.11 JP.SENSOR.12 JP.SENSOR.17 JP.SENSOR.18 JP.SPINDLE.4 R9.1 R12.1 RST.1 RST.2 U1.2 U1.4 U.BTN.2 U.BTN.4 U.BTN.6 U.BTN.8 U.BTN.9 U.BTN.11 U.BTN.13 U.BTN.15 U.X.1.2 U.X.1.3 U.X.2.2 U.X.2.3 U.YZ.2 U.YZ.4 U.YZ.6 U.YZ.8 U.YZ.9 U.YZ.11 U.YZ.13 U.YZ.15 | length 449.1
  Top Layer w0.254: RST.2 RST.1 14.884,91.719 16.51,90.094 U.YZ.15
  Top Layer w0.508: JP.MISC.1 8.89,10.795 9.525,10.16 10.795,10.16 11.43,9.525 JP.PROBE.2 JP.485.1.4 ; 15.24,24.765 16.51,23.495 36.83,23.495 ; JP.485.2.4 27.94,47.625 31.75,47.625 32.385,46.99 32.385,45.72 D2.5 ; R12.1 31.75,10.39 31.75,12.065 32.385,12.7 36.195,12.7 36.83,13.335 D1.5 38.1,14.605 38.1,22.225 36.83,23.495 ; JP.I2C.4 43.18,26.035 40.64,23.495 36.83,23.495
  Top Layer w1.016: JP.MEGA2560.POWER.7 JP.MEGA2560.POWER.6 5.08,74.295 6.35,75.565 6.35,83.185 7.62,84.455 16.51,84.455 ; JP.MISC.1 JP.MISC.2 JP.MEGA2560.DIGITAL.36 JP.MEGA2560.DIGITAL.35 8.89,22.225 10.16,23.495 13.97,23.495 15.24,24.765 15.24,28.575 ; U.BTN.15 15.24,28.575 ; U.BTN.13 15.24,33.655 ; U.BTN.11 15.24,38.735 ; U.BTN.9 15.24,43.815 ; U.YZ.15 16.51,84.455 ; U.BTN.2 15.24,28.575 ; U.BTN.4 15.24,33.655 ; U.BTN.6 15.24,38.735 ; U.BTN.8 15.24,43.815 ; U.YZ.4 21.59,84.455 ; U.YZ.13 21.59,84.455 ; JP.SENSOR.12 JP.SENSOR.11 ; U.YZ.6 26.67,84.455 ; JP.EXT.11 JP.EXT.12 27.94,94.615 ; U.YZ.8 31.75,84.455 ; U.YZ.9 31.75,84.455 ; JP.SENSOR.6 JP.SENSOR.5 ; JP.EXT.6 JP.EXT.5 ; U.X.2.2 38.109,84.455 ; U.X.2.3 38.109,84.455 ; U.X.1.2 44.459,84.455 ; U.X.1.3 44.459,84.455 ; JP.PWR.1 58.575,103.505 C1.- 58.265,103.505 46.99,103.505 45.72,102.235 45.72,97.79 42.545,94.615 27.94,94.615 ; 15.24,28.575 15.24,33.655 ; 15.24,33.655 15.24,38.735 ; 15.24,38.735 15.24,43.815 ; 15.24,43.815 17.78,46.355 JP.SENSOR.18 JP.SENSOR.17 16.51,61.595 U.YZ.2 16.51,84.455 ; 16.51,84.455 21.59,84.455 ; 21.59,84.455 26.67,84.455 ; 26.67,84.455 31.75,84.455 ; 26.67,84.455 U.YZ.11 26.67,93.345 27.94,94.615 ; 31.75,84.455 38.109,84.455 ; 38.109,84.455 44.459,84.455
  Bottom Layer w0.254: U.BTN.8 24.13,43.815 JP.485.2.4 ; U1.4 55.88,88.9 U1.4@55.88,88.891 ; U1.2 55.88,93.98 U1.2@55.88,93.971
  Bottom Layer w0.381: 57.105,88.891 59.32,86.675 64.77,86.675 66.77,84.675 66.77,77.945 JP.SPINDLE.4
  Bottom Layer w1.016: JP.SENSOR.18 17.78,56.515 19.05,55.245 24.13,55.245 25.4,56.515 ; JP.SENSOR.12 25.4,56.515 ; JP.EXT.12 27.94,98.425 29.21,97.155 34.29,97.155 35.56,98.425 JP.EXT.6 ; JP.SENSOR.6 33.02,56.515 31.75,55.245 26.67,55.245 25.4,56.515 ; U1.4@55.88,88.891 57.105,88.891 58.402,90.188 58.402,92.71 57.141,93.971 ; U1.2@55.88,93.971 57.141,93.971 ; C1.- 58.42,95.25 57.141,93.971
MEGA2560.RESET: JP.MEGA2560.POWER.3 RST.3 RST.4 | length 24.6
  Top Layer w0.254: JP.MEGA2560.POWER.3 2.54,81.915 1.905,82.55 1.905,95.885 2.261,96.241 RST.4 RST.3
MEGA2560.VIN.12V: JP.EXT.1 JP.EXT.2 JP.EXT.7 JP.EXT.8 JP.MEGA2560.POWER.8 JP.PWR.3 JP.SENSOR.1 JP.SENSOR.2 JP.SENSOR.7 JP.SENSOR.8 JP.SENSOR.13 JP.SENSOR.14 | length 162.8
  Top Layer w1.016: v1(7.62,100.965) 7.62,103.505 8.89,104.775 31.75,104.775 33.02,103.505 ; JP.SENSOR.14 JP.SENSOR.13 ; JP.SENSOR.8 JP.SENSOR.7 ; JP.EXT.8 JP.EXT.7 33.02,103.505 ; JP.SENSOR.2 JP.SENSOR.1 ; JP.EXT.2 JP.EXT.1 40.64,103.505 39.37,104.775 ; JP.PWR.3 64.135,108.585 62.865,109.855 40.64,109.855 39.37,108.585 39.37,104.775 ; 33.02,103.505 34.29,104.775 39.37,104.775
  Bottom Layer w1.016: JP.MEGA2560.POWER.8 5.08,69.215 ; v1(7.62,100.965) 7.62,88.265 6.35,86.995 6.35,70.485 5.08,69.215 ; JP.SENSOR.13 22.86,61.595 ; JP.SENSOR.7 30.48,61.595 ; JP.SENSOR.1 38.1,61.595 36.83,62.865 33.655,62.865 31.75,62.865 30.48,61.595 ; 5.08,69.215 6.35,67.945 6.35,64.135 7.62,62.865 21.59,62.865 22.86,61.595 ; 22.86,61.595 24.13,62.865 29.21,62.865 30.48,61.595
NetD.A_1: D.A.1 R.A.2 | length 2.5
  Top Layer w0.508: D.A.1 R.A.2
NetD.A_2: D.A.2 U.BTN.7 | length 10.5
  Top Layer w0.508: U.BTN.7 20.32,41.275 22.86,38.735 22.86,34.925 D.A.2
NetD.D_1: D.D.1 R.D.2 | length 2.5
  Top Layer w0.508: D.D.1 R.D.2
NetD.D_2: D.D.2 U.BTN.1 | length 5.1
  Top Layer w0.508: U.BTN.1 D.D.2
NetD.FLOOD_1: D.FLOOD.1 R.FLOOD.2 | length 2.3
  Top Layer w0.254: R.FLOOD.2@58.42,73.025 D.FLOOD.1
NetD.FLOOD_2: D.FLOOD.2 U1.1 | length 22.4
  Top Layer w0.254: U1.1 58.42,96.52 59.69,95.25 59.69,79.605 D.FLOOD.2
NetD.H_1: D.H.1 R.H.2 | length 2.5
  Top Layer w0.508: D.H.1 R.H.2
NetD.H_2: D.H.2 U.BTN.5 | length 8.7
  Top Layer w0.508: U.BTN.5 20.32,36.195 21.59,34.925 21.59,32.385 22.86,31.115 D.H.2
NetD.MIST_1: D.MIST.1 R.MIST.2 | length 2.7
  Top Layer w0.254: R.MIST.2 D.MIST.1
NetD.MIST_2: D.MIST.2 U1.3 | length 10.4
  Top Layer w0.254: D.MIST.2 56.11,84.05 58.42,86.36 58.42,90.17 57.159,91.431 U1.3@55.88,91.431
NetD.S_1: D.S.1 R.S.2 | length 2.5
  Top Layer w0.508: D.S.1 R.S.2
NetD.S_2: D.S.2 U.BTN.3 | length 6.1
  Top Layer w0.508: U.BTN.3 20.32,31.115 22.86,28.575 D.S.2
NetD.X.1_1: D.X.1.1 R.X.1.2 | length 3.3
  Top Layer w0.508: R.X.1.2 D.X.1.1
NetD.X.1_2: D.X.1.2 U.X.1.1 | length 3.6
  Top Layer w0.508: D.X.1.2 U.X.1.1@41.91,80.636
NetD.X.2_1: D.X.2.1 R.X.2.2 | length 3.3
  Top Layer w0.508: R.X.2.2 D.X.2.1
NetD.X.2_2: D.X.2.2 U.X.2.1 | length 3.6
  Top Layer w0.508: D.X.2.2 U.X.2.1@35.56,80.636
NetD.Y.1_1: D.Y.1.1 R.Y.1.2 | length 3.3
  Top Layer w0.508: R.Y.1.2 D.Y.1.1
NetD.Y.1_2: D.Y.1.2 U.YZ.5 | length 3.6
  Top Layer w0.508: D.Y.1.2 U.YZ.5
NetD.Y.2_1: D.Y.2.1 R.Y.2.2 | length 3.3
  Top Layer w0.508: R.Y.2.2 D.Y.2.1
NetD.Y.2_2: D.Y.2.2 U.YZ.7 | length 3.6
  Top Layer w0.508: D.Y.2.2 U.YZ.7
NetD.Z.1_1: D.Z.1.1 R.Z.1.2 | length 3.3
  Top Layer w0.508: R.Z.1.2 D.Z.1.1
NetD.Z.1_2: D.Z.1.2 U.YZ.1 | length 3.6
  Top Layer w0.508: D.Z.1.2 U.YZ.1
NetD.Z.2_1: D.Z.2.1 R.Z.2.2 | length 3.3
  Top Layer w0.508: R.Z.2.2 D.Z.2.1
NetD.Z.2_2: D.Z.2.2 U.YZ.3 | length 3.6
  Top Layer w0.508: D.Z.2.2 U.YZ.3
NetJP.BUTTONS_2: JP.BUTTONS.2 R.D.1 | length 4.8
  Top Layer w0.508: R.D.1 JP.BUTTONS.2
NetJP.BUTTONS_4: JP.BUTTONS.4 R.S.1 | length 4.8
  Top Layer w0.508: R.S.1 JP.BUTTONS.4
NetJP.BUTTONS_6: JP.BUTTONS.6 R.H.1 | length 4.8
  Top Layer w0.508: R.H.1 JP.BUTTONS.6
NetJP.BUTTONS_8: JP.BUTTONS.8 R.A.1 | length 4.8
  Top Layer w0.508: R.A.1 JP.BUTTONS.8
NetJP.COOLANT_1: JP.COOLANT.1 U1.5 | length 3.2
  Bottom Layer w0.254: U1.5 U1.5@63.509,88.9
  Bottom Layer w1.016: U1.5@63.509,88.9 JP.COOLANT.1
NetJP.COOLANT_2: JP.COOLANT.2 U1.6 | length 3.2
  Bottom Layer w0.254: U1.6 U1.6@63.509,91.44
  Bottom Layer w1.016: U1.6@63.509,91.44 JP.COOLANT.2
NetJP.COOLANT_3: JP.COOLANT.3 U1.7 | length 3.2
  Bottom Layer w0.254: U1.7 U1.7@63.509,93.98
  Bottom Layer w1.016: U1.7@63.509,93.98 JP.COOLANT.3
NetJP.COOLANT_4: JP.COOLANT.4 U1.8 | length 3.2
  Bottom Layer w0.254: U1.8 63.5,96.52 U1.8@63.5,96.511
  Bottom Layer w1.016: U1.8@63.5,96.511 66.031,96.511 JP.COOLANT.4
SENSOR.LIMIT.X.1: JP.SENSOR.3 R.X.1.1 | length 12.3
  Top Layer w0.254: JP.SENSOR.3 35.56,64.135 36.83,65.405 40.64,65.405 41.91,66.675 R.X.1.1
SENSOR.LIMIT.X.2: JP.SENSOR.4 R.X.2.1 | length 11
  Top Layer w0.254: JP.SENSOR.4 34.29,59.055 34.29,65.405 35.56,66.675 R.X.2.1
SENSOR.LIMIT.Y.1: JP.SENSOR.9 R.Y.1.1 | length 9.7
  Top Layer w0.254: R.Y.1.1 24.13,66.675 25.4,65.405 26.67,65.405 27.94,64.135 JP.SENSOR.9
SENSOR.LIMIT.Y.2: JP.SENSOR.10 R.Y.2.1 | length 10.5
  Top Layer w0.254: JP.SENSOR.10 29.21,59.055 R.Y.2.1
SENSOR.LIMIT.Z.1: JP.SENSOR.15 R.Z.1.1 | length 13.7
  Top Layer w0.254: v1(13.97,65.405) R.Z.1.1 ; JP.SENSOR.15 v1(20.32,65.405)
  Bottom Layer w0.254: v1(13.97,65.405) v1(20.32,65.405)
SENSOR.LIMIT.Z.2: JP.SENSOR.16 R.Z.2.1 | length 10.5
  Top Layer w0.254: R.Z.2.1 19.05,59.055 JP.SENSOR.16
pads on no net: JP.MEGA2560.ANALOG.HIGH.5 JP.MEGA2560.ANALOG.HIGH.6 JP.MEGA2560.ANALOG.HIGH.7 JP.MEGA2560.ANALOG.LOW.1 JP.MEGA2560.ANALOG.LOW.2 JP.MEGA2560.ANALOG.LOW.3 JP.MEGA2560.ANALOG.LOW.4 JP.MEGA2560.ANALOG.LOW.5 JP.MEGA2560.ANALOG.LOW.6 JP.MEGA2560.ANALOG.LOW.7 JP.MEGA2560.ANALOG.LOW.8 JP.MEGA2560.DIGITAL.1 JP.MEGA2560.DIGITAL.2 JP.MEGA2560.DIGITAL.3 JP.MEGA2560.DIGITAL.4 JP.MEGA2560.DIGITAL.8 JP.MEGA2560.DIGITAL.9 JP.MEGA2560.DIGITAL.10 JP.MEGA2560.DIGITAL.14 JP.MEGA2560.POWER.1 JP.MEGA2560.POWER.2 JP.MEGA2560.POWER.4 JP.MEGA2560.POWER.5 JP.MEGA2560.PWM.HIGH.1 JP.MEGA2560.PWM.HIGH.2 JP.MEGA2560.PWM.HIGH.3 JP.MEGA2560.PWM.HIGH.4 JP.MEGA2560.PWM.LOW.4 JP.MEGA2560.PWM.LOW.5 JP.MEGA2560.PWM.LOW.6 JP.SPINDLE.0 JP.STEPPER-X1.0 JP.STEPPER-X2.0 JP.STEPPER-Y.0 JP.STEPPER-Z.0

## Polygon pours and split planes (outlines as drawn)
MEGA2560.GND on Top Layer "Top Layer GND" (solid, pour order 4): 0,0 78,0 78,122 0,122

## Keep-outs
Keep-Out Layer:
  the board outline again, w0.254

## Text inside footprints (layer, text, board x,y; h text height)
JP.BUTTONS: Mechanical 16 "2" at 38.1,23.495 h1.27 r90; Mechanical 16 "1" at 40.64,23.749 h1.27 r90; Mechanical 16 "7" at 40.64,35.433 h1.27 r90; Mechanical 16 "8" at 38.1,35.433 h1.27 r90
JP.EXT: Mechanical 16 "22" at 13.462,100.33 h1.27 r180; Mechanical 16 "21" at 13.462,102.87 h1.27 r180; Mechanical 16 "2" at 43.18,100.33 h1.27 r180; Mechanical 16 "1" at 42.926,102.87 h1.27 r180
JP.MEGA2560.DIGITAL: Mechanical 16 "36" at 7.112,19.05 h1.27 r180; Mechanical 16 "35" at 7.112,21.59 h1.27 r180; Mechanical 16 "1" at 54.356,21.59 h1.27 r180; Mechanical 16 "2" at 54.61,19.05 h1.27 r180
JP.MISC: Mechanical 16 "16" at 28.448,13.97 h1.27; Mechanical 16 "15" at 28.448,11.43 h1.27; Mechanical 16 "1" at 6.604,11.43 h1.27; Mechanical 16 "2" at 6.35,13.97 h1.27
JP.SENSOR: Mechanical 16 "2" at 40.64,58.42 h1.27 r180; Mechanical 16 "1" at 40.386,60.96 h1.27 r180; Mechanical 16 "17" at 16.002,60.96 h1.27 r180; Mechanical 16 "18" at 16.002,58.42 h1.27 r180
RST: Mechanical 16 "4" at 4.064,96.774 h1.97 r180; Mechanical 16 "3" at 12.192,96.774 h1.97 r180; Mechanical 16 "2" at 4.064,92.456 h1.97 r180; Mechanical 16 "1" at 11.938,92.329 h1.97 r180